# Altium PCB X-Bot.PcbDoc
Units mil, origin at the board's own origin, x right, y up, seen from the top; angles counter-clockwise.
Board outline 3475.03 x 2705.03 mil, 2 copper layers (Top1, Bottom4), stack 53.981 mil thick; 46 components, 50 nets, 205 pads, 123 vias.
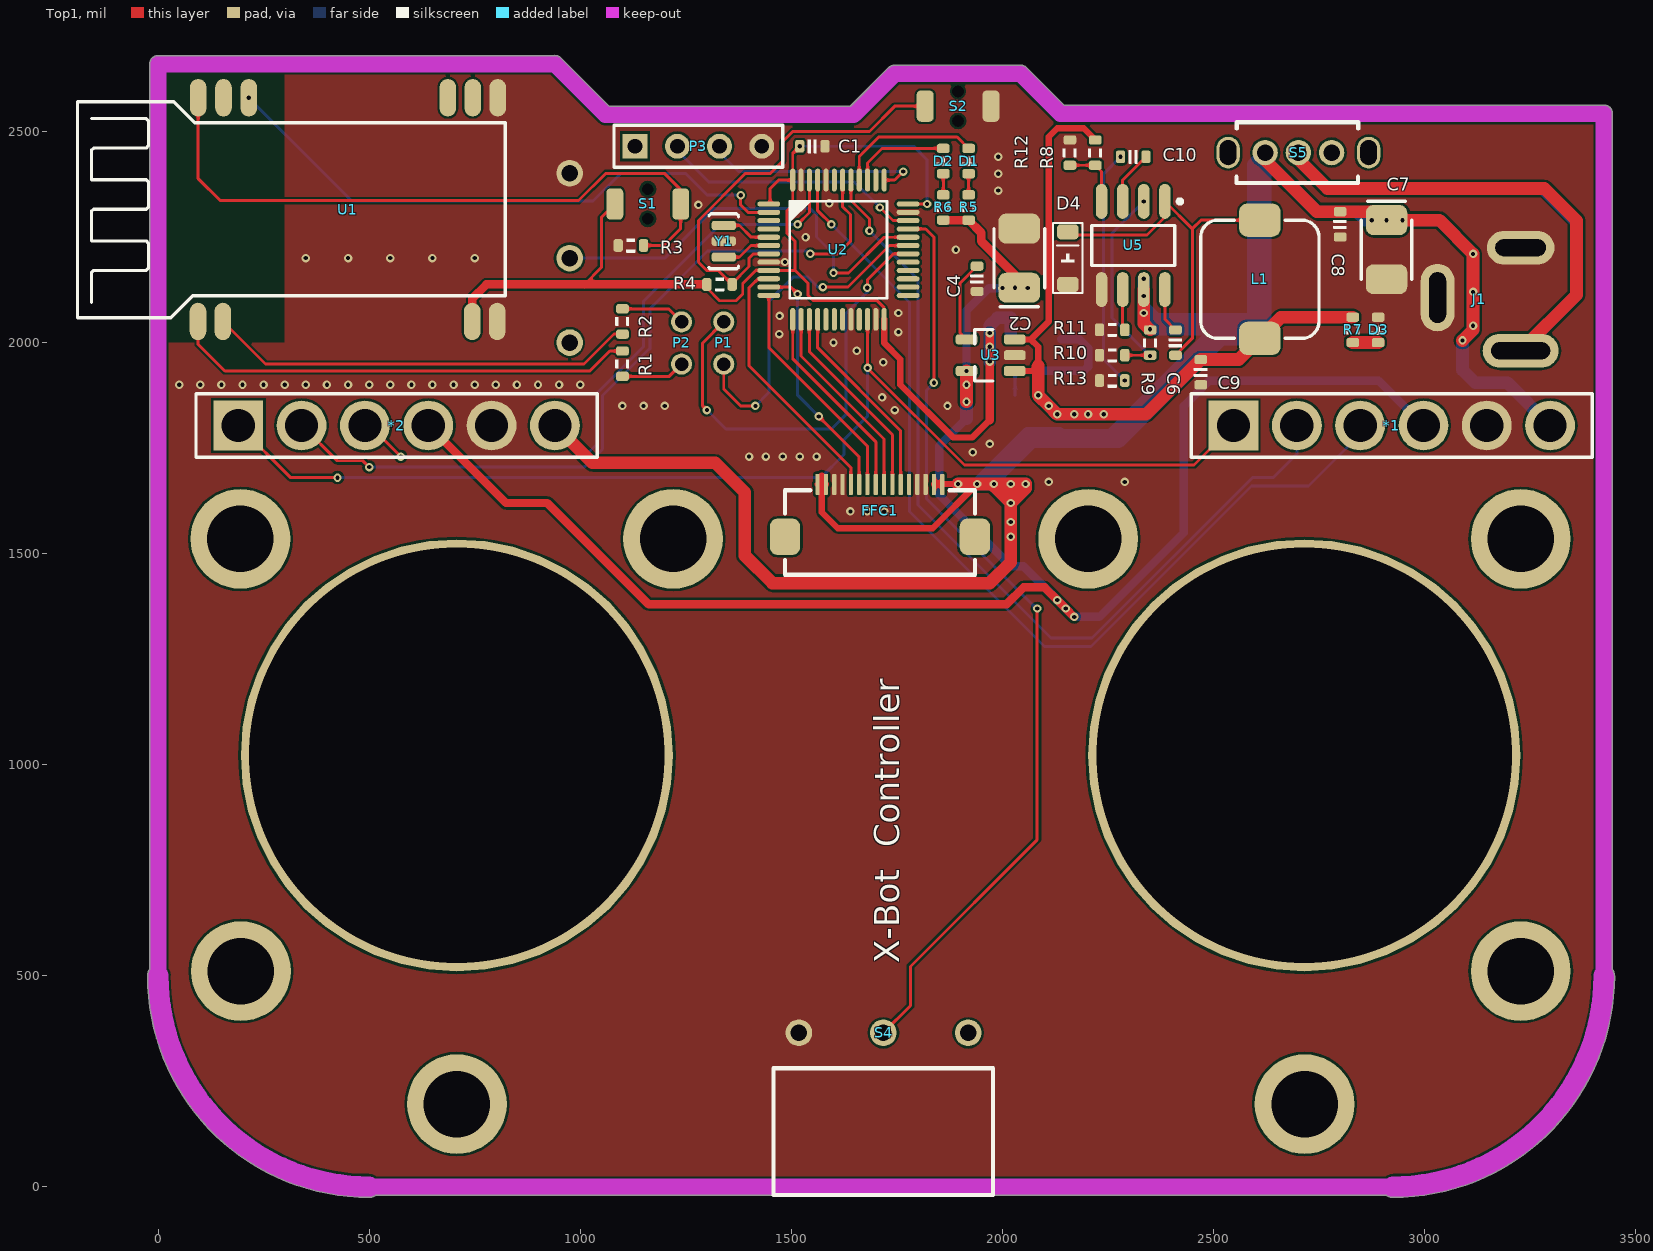
[diagram p0: Top1 view]
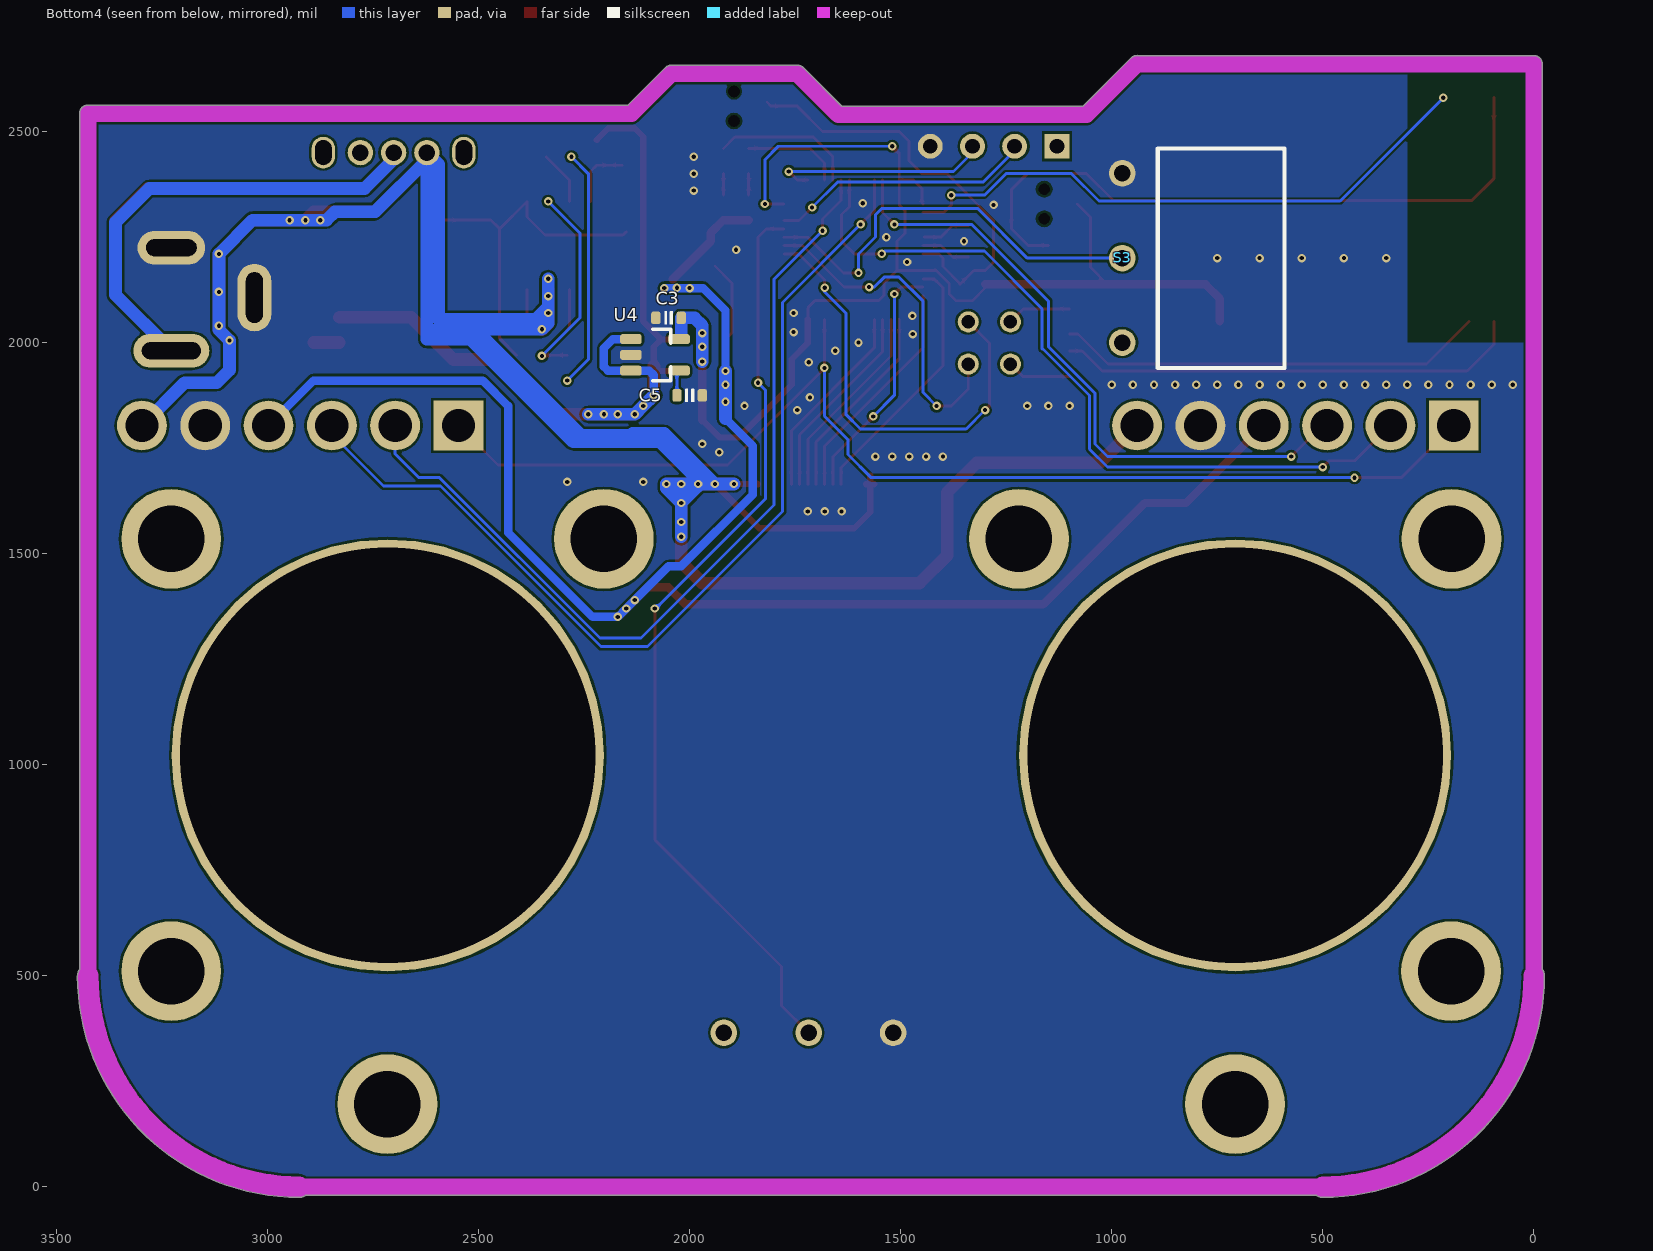
[diagram p1: Bottom4 view, seen from below]
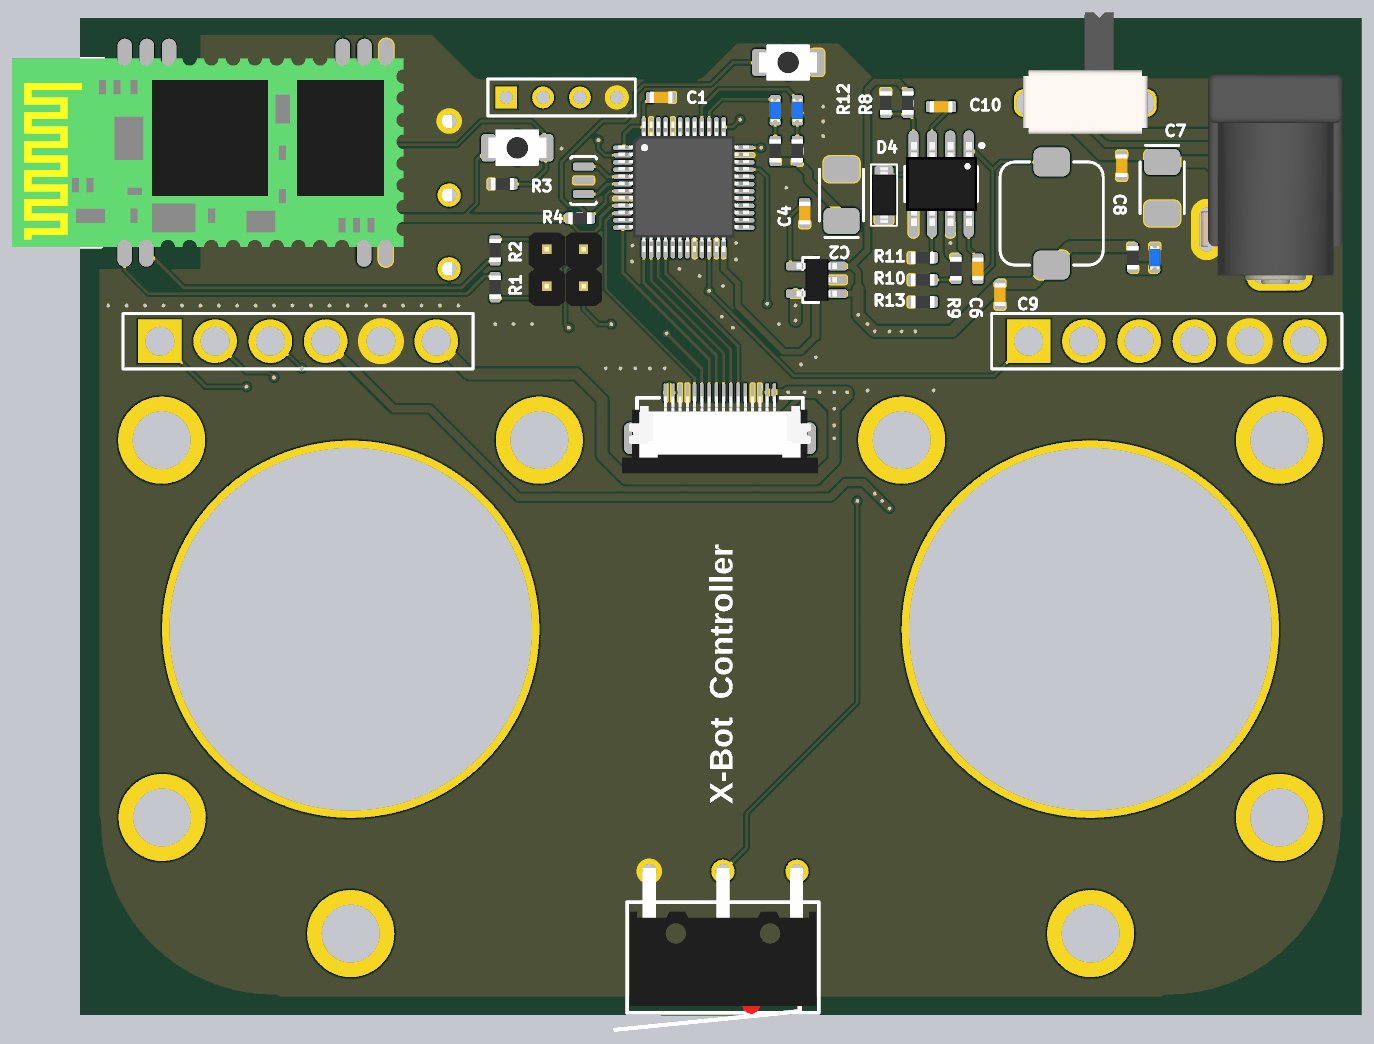
[diagram p2: 3D render of the assembled board from above, using the file's embedded part models]
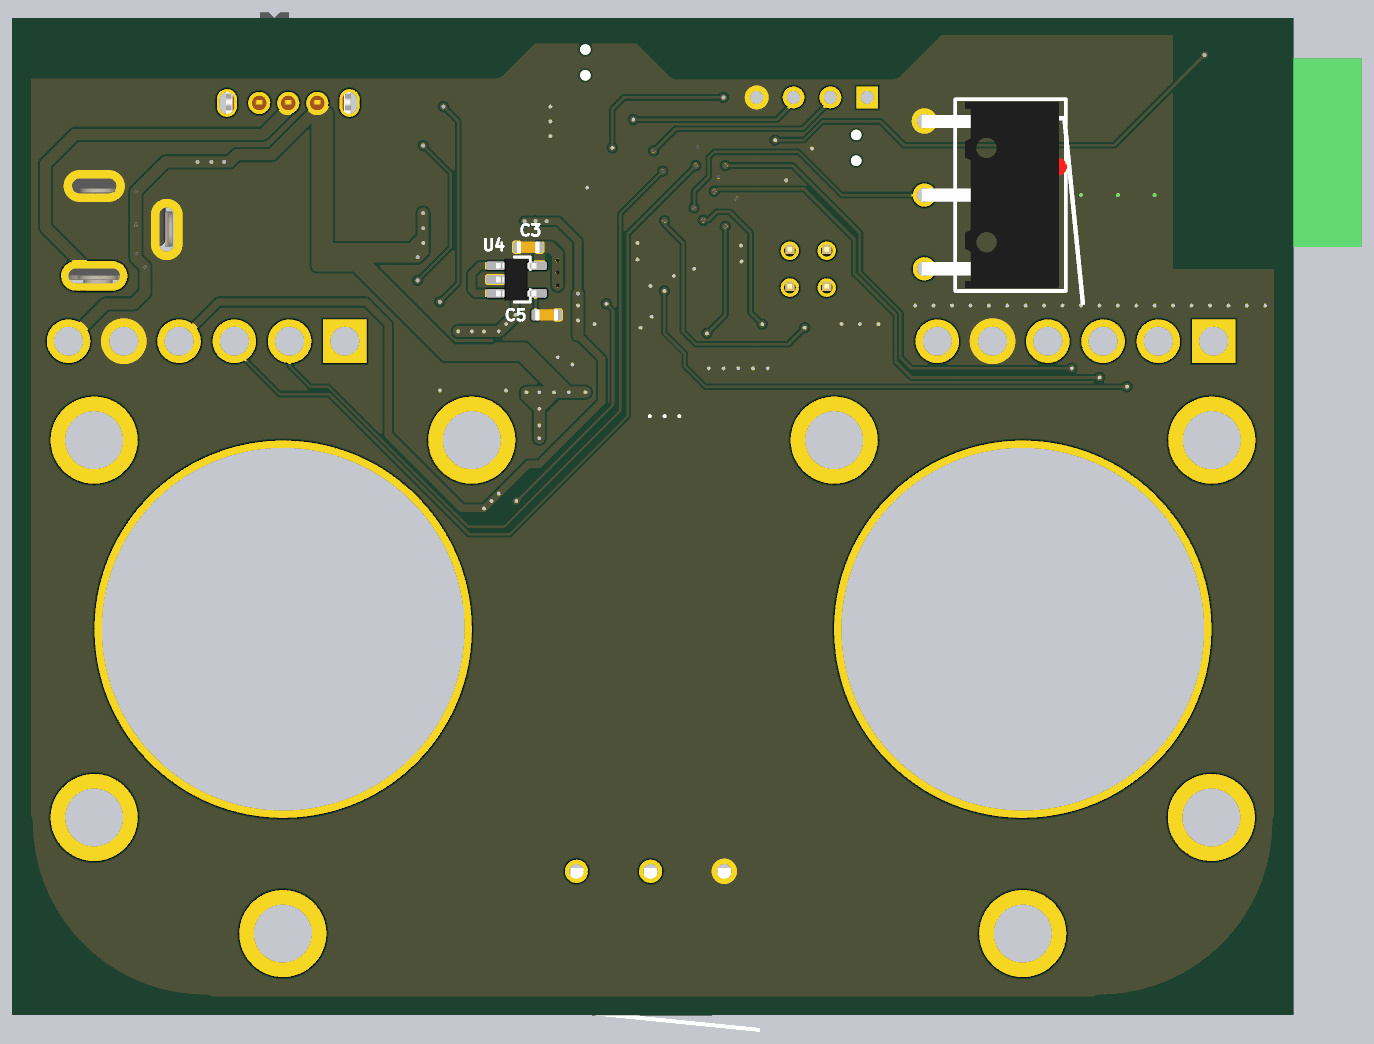
[diagram p3: 3D render of the assembled board from below, using the file's embedded part models]

## Layer stack, top to bottom
Top Solder: solder mask 0.4, Solder Resist, Dk 3.5
Top1: signal copper 1.4
Dielectric 1: core 51.1811, FR-4, Dk 4.2
Bottom4: signal copper 1.4
Bottom Solder: solder mask 0.4, Solder Resist, Dk 3.5

## Board outline
-25.01,500 cw(c0,500) -19.7,515.42 -19.7,2660 cw(c0,2660) 0,2679.7 936.46,2679.7 cw(c940,2660) 954.15,2674.15 1068.29,2560.02 1639.71,2560.02 1730.97,2651.27 1730.93,2651.24 cw(c1745.12,2637.12) 1745.12,2657.13 2042.88,2657.13 cw(c2042.88,2637.12) 2057.07,2651.24 2057.03,2651.27 2145.79,2562.52 3425,2562.52 cw(c3425,2542.5) 3445.01,2542.5 cw(c3425,2542.5) 3444.7,2538.96 3444.7,515.42 cw(c3425,500) 3450.02,500 cw(c2925,500) 2925,-25.01 cw(c2925,0) 2909.58,-19.7 515.42,-19.7 cw(c500,0) 500,-25.01 cw(c500,500)

## Design rules (kind name [scope] priority, off if disabled: settings)
Clearance [All] p1: gap=5.5
ComponentClearance [All] p1: gap=0 collisioncheckmode=3 verticalgap=0 showdistances=FALSE
DiffPairsRouting [All] p1: maxlimit=9 minlimit=9 mostfreqgap=9 toplayer_minwidth=4 toplayer_maxwidth=4 toplayer_prefwidth=4 bottomlayer_minwidth=4 bottomlayer_maxwidth=4 bottomlayer_prefwidth=4 maxuncoupledlength=500
FanoutControl Fanout_BGA [All] p1: bgadir=Out bgaviamode=Centered fanoutstyle=Auto fanoutdirection=Alternating viagrid=1 // Fanout_BGA (Default Rule)
HoleSize [All] p1: absolutevalues=TRUE maxlimit=10000 minlimit=8 maxpercent=80.000 minpercent=20.000
MinimumSolderMaskSliver [All] p1 off: minsoldermaskwidth=2
PlaneClearance [All] p1: clearance=8
PlaneConnect [All] p1: planeconnectstyle=Direct reliefexpansion=20 reliefentries=4 reliefconductorwidth=10 reliefairgap=10
PolygonConnect [All] p1: connectstyle=Direct reliefconductorwidth=10 reliefentries=4 polygonreliefangle="90 Angle" airgapwidth=10
RoutingVias [All] p1: holewidth=8 width=16 viastyle="Through Hole" minholewidth=6 minwidth=12 maxholewidth=28 maxwidth=50
SilkToBoardRegionClearance [All] p1 off:
SilkToSilkClearance [All] p1: silktosilkclearance=0
SilkToSolderMaskClearance [IsPad] p1: minsilkscreentomaskgap=0 clearancetoexposedcopper=TRUE
SolderMaskExpansion [All] p1: expansion=3
Width [All] p1: maxlimit=10000 minlimit=6 preferedwidth=7
20 further rules are at their usual default settings.

## Components (designator, comment, footprint, x,y, rotation, side; value= is the part's Value field where it differs from the comment)
*1 "STEPPER_DRIVER" STEPPER_DRIVER 2947.5,1803.5 r0 top
*2 "STEPPER_DRIVER" STEPPER_DRIVER 590,1803.5 r0 top
C1 "0.1u" 0603-CAP 1550,2465 r180 top
C2 "100uF" 3528-CAP 2040,2200 r90 top
C3 "10uF" 0603-CAP 2050,2058.5 r180 bottom
C4 "10nF" 0603-CAP 1940,2151.1 r90 top
C5 "10nF" 0603-CAP 2000,1874.82 r0 bottom
C6 "0.1u" 0603-CAP 2410,2000 r270 top
C7 "100uF" 3528-CAP 2910,2220 r270 top
C8 "0.1u" 0603-CAP 2800,2280 r90 top
C9 "0.1u" 0603-CAP 2470,1930 r270 top
C10 "0.1u" 0603-CAP 2310,2440 r0 top
D1 "LED-0603" 0603-LED-BLUE 1920,2430 r90 top
D2 "LED-0603" 0603-LED-BLUE 1860,2430 r90 top
D3 "LED-0603" 0603-LED-BLUE 2890,2030 r90 top
D4 "二极管-5819W" SOD-123 2155,2200 r90 top
FFC1 "FFC_0.5_16" FFC_0.5_16 1710,1600 r0 top
J1 "PowerJack_2.5" KLD_0202 3227.72,2520 r270 top
L1 "10uH" L-SMD-7 2610,2150 r270 top
P1 "HDR1x2_2.54" HDR1X2_2.54_180 1340,2049.08 r0 top
P2 "HDR1x2_2.54" HDR1X2_2.54_180 1240,2049.08 r0 top
P3 "Header 4" HDR1X4 1130,2465 r0 top
R1 "33R" 0603-RES 1100,1950 r90 top
R2 "33R" 0603-RES 1100,2050 r270 top
R3 "4.7K" 0603-RES 1120,2230 r0 top
R4 "4.7K" 0603-RES 1330,2137.66 r180 top
R5 "1K" 0603-RES 1920,2320 r90 top
R6 "1K" 0603-RES 1860,2320 r90 top
R7 "500R" 0603-RES 2830,2030 r270 top
R8 "47K" 0603-RES 2220,2450 r270 top
R9 "100K" 0603-RES 2350,2000 r90 top
R10 "50K" 0603-RES 2260,1970 r0 top
R11 "100K" 0603-RES 2260,2030 r0 top
R12 "9K" 0603-RES 2160,2450 r270 top
R13 "100K" 0603-RES 2260,1910 r0 top
S1 "ButtonTACT_3x4x2_180" ButtonTACT_3x4x2_180H 1160,2328.27 r0 top
S2 "ButtonTACT_3x4x2_180" ButtonTACT_3x4x2_180H 1895,2560 r0 top
S3 "LimitSwitch" "LIMIT SWITCH" 761,2200 r90 bottom
S4 "LimitSwitch" "LIMIT SWITCH" 1718,151 r0 top
S5 "SwitchSPDT_4.3x8.6_D90" SwitchSPDT_4.3X8.6_D90 2780,2450 r180 top
U1 "HC-06" 蓝牙模块HC-06 870,2060 r90 top
U2 "STM32F103C8T6" LQFP-48 1611.73,2220 r0 top
U3 "LP2992" SOT23-5 1970,1970 r180 top
U4 "LP2992" SOT23-5 2080,1970.82 r180 bottom
U5 "MP1584" SO-8 2310,2230 r270 top
Y1 "8MHz" 晶振-3P 1340,2240 r90 top

## Footprints (in the part's own frame and the unit in brackets; to place one, negate y for a bottom-side part, rotate by r counter-clockwise, add the part's x,y. Pads: shape width x height; smd on the part's side, far side on the other; paste and mask are expansions set on the pad)
0603-CAP [mil]
  rrect50% 22x30 smd: 1(-30,0) 2(30,0)
  silkscreen extent -10,-15 10,15, body extent -31,-16 32,16, height 31
0603-LED-BLUE [mil]
  rrect50% 22x30 smd: 1(-30,0) 2(30,0)
  silkscreen extent -10,-16 10,16, body extent -32,-16 32,16, height 24
0603-RES [mil]
  rrect50% 22x30 smd: 1(-30,0) 2(30,0)
  silkscreen extent -10,-16 10,16, body extent -31,-16 31,16, height 18
3528-CAP [mm] "钽电容"
  rrect50% 1.8x2.5 smd: 1(-1.778,0) 2(1.778,0)
  silkscreen extent -2.92,-1.52 1.78,1.52, body extent -1.91,-1.4 1.91,1.4, height 1.1
ButtonTACT_3x4x2_180H [mil]
  round 0 hole 28: 0(0,-35) 0(0,35)
  rrect50% 40x74 smd: 1(-78,0) 2(78,0)
  body extent -79,-49 79,49, height 63
FFC_0.5_16 [mil]
  rrect50% 72x86 smd: 0(-225,-60) 0(225,-60)
  rrect50% 10x50 smd: 1(-147.64,64) 2(-127.95,64) 3(-108.27,64) 4(-88.58,64) 5(-68.9,64) 6(-49.21,64) 7(-29.53,64) 8(-9.84,64) 9(9.84,64) 10(29.53,64) 11(49.21,64) 12(68.9,64) 13(88.58,64) 14(108.27,64) 15(127.95,64) 16(147.64,64)
  silkscreen extent -225,-150 225,50, body extent -266,-155 266,55, height 82
HDR1X2_2.54_180 [mil]
  round 50 hole 32: 1(0,0) 2(0,-100)
  body extent -49,-150 49,50, height 323
HDR1X4 [mm] "Connector; Header; 4 Position"
  rect 1.5x1.5 hole 0.9: 1(0,0)
  round 1.5 hole 0.9: 2(2.54,0) 3(5.08,0) 4(7.62,0)
  silkscreen extent -1.27,-1.27 8.89,1.27
KLD_0202 [mil]
  oval 80x180 hole 40 slot 140 at 90 deg: 1(539.37,0)
  oval 80x160 hole 40 slot 120 at 90 deg: 2(295.28,0)
  oval 160x80 hole 40 slot 120 at 0 deg: 3(413.39,-196.85)
  body extent -9,-213 562,173, height 433
L-SMD-7 [mm] "贴片电感7*7"
  rrect50% 2x2.5 smd: 1(-3.556,0) 2(3.556,0)
  silkscreen extent -3.56,-3.56 3.56,3.56, body extent -3.56,-3.56 3.56,3.56, height 4
"LIMIT SWITCH" [mm]
  round 1.6 hole 1: 1(-5.08,5.436) 2(0,5.436) 3(5.105,5.436)
  silkscreen extent -6.6,-4.32 6.6,3.3, body extent -7.58,-5.65 6.4,5.65, height 5.8
LQFP-48 [mil]
  oval 54x12 smd: 1(-165,108.27) 2(-165,88.58) 3(-165,68.9) 4(-165,49.21) 5(-165,29.53) 6(-165,9.84) 7(-165,-9.84) 8(-165,-29.53) 9(-165,-49.21) 10(-165,-68.9) 11(-165,-88.58) 12(-165,-108.27) 25(165,-108.27) 26(165,-88.58) 27(165,-68.9) 28(165,-49.21) 29(165,-29.53) 30(165,-9.84) 31(165,9.84) 32(165,29.53) 33(165,49.21) 34(165,68.9) 35(165,88.58) 36(165,108.27)
  oval 12x54 smd: 13(-108.27,-165) 14(-88.58,-165) 15(-68.9,-165) 16(-49.21,-165) 17(-29.53,-165) 18(-9.84,-165) 19(9.84,-165) 20(29.53,-165) 21(49.21,-165) 22(68.9,-165) 23(88.58,-165) 24(108.27,-165) 37(108.27,165) 38(88.58,165) 39(68.9,165) 40(49.21,165) 41(29.53,165) 42(9.84,165) 43(-9.84,165) 44(-29.53,165) 45(-49.21,165) 46(-68.9,165) 47(-88.58,165) 48(-108.27,165)
  silkscreen extent -115,-115 115,115, body extent -177,-175 177,180, height 61
SO-8 [mm]
  oval 2.1x0.7 smd: 1(-2.65,1.905) 2(-2.65,0.635) 3(-2.65,-0.635) 4(-2.65,-1.905) 5(2.65,-1.905) 6(2.65,-0.635) 7(2.65,0.635) 8(2.65,1.905)
  silkscreen extent -2.77,-2.5 1.2,2.93, body extent -2.89,-2.41 2.89,2.49, height 1.45
SOD-123 [mm]
  rrect50% 0.9x1.3 smd: 1(-1.583,0) 2(1.583,0)
  silkscreen extent -2.11,-0.89 2.11,0.89, body extent -1.92,-0.86 1.93,0.84, height 1.48
SOT23-5 [mm] "SOT23, 3-Leads, Body 3.1x3.0mm (max), Pitch 0.95mm, IPC Medium Density"
  rrect50% 1.3x0.6 smd: 1(-1.5,0.95) 2(-1.5,0) 3(-1.5,-0.95) 4(1.396,-0.95) 5(1.396,0.95)
  silkscreen extent -0.2,-1.55 0.9,1.55, body extent -1.48,-1.45 1.32,1.45, height 1.2
STEPPER_DRIVER [mm]
  rect 3x3 hole 2: 1(-10.16,0)
  round 3 hole 2: 2(-6.35,0) 3(-2.54,0) 4(1.27,0) 5(5.08,0) 6(8.89,0)
  silkscreen extent -12.7,-1.91 11.43,1.91
SwitchSPDT_4.3X8.6_D90 [mil]
  oval 55x75 hole 39.37 slot 59.06 at 90 deg: 0(-87.68,0) 0(245.16,0)
  round 60 hole 39.37: 1(0,0) 2(78.74,0) 3(157.48,0)
  silkscreen extent -63,-72 225,72, body extent -91,-246 248,84, height 190
晶振-3P [mm] "贴片晶振"
  rrect50% 0.55x1.45 smd: 1(-0.95,0) 2(0,0) 3(0.95,0)
  silkscreen extent -1.65,-0.89 1.65,0.91, body extent -1.75,-0.75 1.75,0.75, height 0.3
蓝牙模块HC-06 [mil]
  oval 88.74x39.37 smd: 1(-10,775.43) 2(-10,716.38) 12(-10,125.83) 13(-10,66.77) 22(520,65.43) 23(520,124.49) 24(520,183.54) 32(520,655.04) 33(520,715) 34(520,775)
  silkscreen extent -1,48 511,1061, body extent -1,19 511,1082, height 163

## Part data
C1 C3 C4 C5 C6 C8 C9 C10: library part 电容-0603, "Capacitor"
C2 C7: library part "电容 3528", "极性电解电容"
D1 D2 D3: "LED"
D4: "40V"
FFC1: "FFC"
J1: "DC Power Jack"
L1: library part 电感-0805, "磁珠"
P1 P2: "Header"
P3: "Header, 4-Pin"
R1 R2 R3 R4 R5 R6 R7 R8 R9 R10 R11 R12 R13: library part 电阻-0603, "Resistor"
S1 S2: "Button"
S5: "Switch"
U1: library part HM01_02_09_1, "HM bluetooth module HM-01,HM-02,HM-09"
U2: "MCU"
U3 U4: "LDO"
U5: "电源芯片"
Y1: library part 晶振-3Pin, "村田贴片"

## Free pads (board coordinates)
  round 236.22 hole 157.48: ""(195,1535) ""(196.23,511) ""(708,196) ""(1219.85,1535) ""(2203.15,1535) ""(2715.91,196) ""(3228,511) ""(3228,1535)
  round 1023.62 hole 984.25: ""(708,1022) ""(2715,1022)

## Via types
v1: diameter 20, hole 10, Top1 to Bottom4, tented both sides, 123 vias

## Nets (pads, with @x,y where several pads share a name; then routed paths per layer and width w, separated by ;. In a path a pad name is that pad's centre, name@x,y a point inside that pad or via, vN(x,y) a via of type N, cw(c..) or ccw(c..) an arc to the next point about the centre after c; other vN are vias at no path point)
ADC4: FFC1.9 U2.14 | length 472.5
  Top1 w7: U2.14 1523.15,1968.11 1719.84,1771.42 FFC1.9
ADC5: FFC1.10 U2.15 | length 472.5
  Top1 w7: U2.15 1542.83,1978.17 1739.53,1781.47 FFC1.10
ADC6: FFC1.11 U2.16 | length 472.5
  Top1 w7: U2.16 1562.52,1987.48 1759.21,1790.79 FFC1.11
BT_CNT: U1.32 U2.2 | length 1412
  Top1 w7: v1(1380,2349.21) 1380,2325.82 1397.24,2308.58 U2.2
  Bottom4 w7: v1@214.4,2580 459.06,2335.33 1030.44,2335.33 1095.1,2400 1250.76,2400 1301.55,2349.21 v1(1380,2349.21)
  other v1: 214.96,2580
BT_Rx: P2.1 R2.1 | length 152.8
  Top1 w7: R2.1 1209.08,2080 P2.1
BT_SET: R3.2 S1.2 U1.34 | length 1595.8
  Top1 w7: U1.34 95,2388.27 147.05,2336.22 996.22,2336.22 1061,2401 1199,2401 1238,2362 S1.2 1238,2270 1198,2230 R3.2
BT_Tx: P2.2 R1.1 | length 152
  Top1 w7: R1.1 1210.92,1920 P2.2
GND: *1.5 *2.5 C1.1 C2.2 C3.1 C4.1 C5.1 C7.2 C8.1 C9.2 D3.2 D4.1 FFC1.3 FFC1.4 FFC1.13 FFC1.14 J1.2 J1.3 P3.4 R3.1 R10.1 R11.1 R12.1 R13.1 S2.2 S3.3 S4.1 U1.13 U1.22 U2.8 U2.20 U2.23 U2.35 U2.44 U2.47 U3.2 U4.2 U5.5 Y1.2
  other v1: 1640,1600 1680,1600 1720,1600 2110,1670 2290,1670 1400,1730 1440,1730 1480,1730 1520,1730 1560,1730 1930,1740 1970,1760 1745,1840 1100,1850 1150,1850 1200,1850 1870,1850 1715,1870 50,1900 100,1900 150,1900 200,1900 250,1900 300,1900 350,1900 400,1900 450,1900 500,1900 550,1900 600,1900 650,1900 700,1900 750,1900 800,1900 850,1900 900,1900 950,1900 1000,1900 1718,1953.28 1654.82,1980.63 1600,2000 1471.52,2020 1753.83,2024.94 1472.22,2063.25 1753.83,2070 1485,2190.89 350,2200 450,2200 550,2200 650,2200 750,2200 1890,2220 1350,2240 1533.83,2249.53 1280,2326.05 1590,2330 1990,2360 1990,2400 1990,2440
LED1: D1.2 U2.40 | length 345.3
  Top1 w7: U2.40 1660.94,2440.94 1707,2487 1893,2487 D1.2
LED2: D2.2 U2.39 | length 234.2
  Top1 w7: U2.39 1680.63,2425.63 1715,2460 D2.2
NetC4_2: C4.2 U3.4 | length 196.5
  Top1 w7: U3.4 1900,2022.46 1900,2141.1 C4.2
NetC5_2: C5.2 U4.4 | length 60.6
  Bottom4 w7: U4.4 2030,1928.48 C5.2
NetC6_1: C6.1 U5.8 | length 106
  Top1 w7: U5.8 2385,2055 C6.1
NetC6_2: C6.2 D4.2 L1.1 U5.1 | length 869
  Top1 w7: D4.2@2150,2262.34 2157.34,2255 2342.76,2255 2385,2297.24 U5.1 2450,2269.33 ; C6.2 2450,2010 2450,2269.33 ; L1.1 2470.67,2290 2450,2269.33
NetC10_1: C10.1 R13.2 | length 567.3
  Bottom4 w7: v1(2280,2440) 2240,2400 2240,1960 v1(2290,1910)
NetC10_2: C10.2 U5.3 | length 128.5
  Top1 w7: U5.3 2285,2385 C10.2
NetD1_1: D1.1 R5.2 | length 50
  Top1 w7: R5.2 D1.1
NetD2_1: D2.1 R6.2 | length 50
  Top1 w7: R6.2 D2.1
NetD3_1: D3.1 R7.2 | length 60
  Top1 w30: R7.2 D3.1
NetJ1_1: J1.1 S5.2 | length 2193.8
  Top1 w30: S5.2 2701.26,2433.74 2770,2365 3283.9,2365 3360,2288.9 3360,2112.91 J1.1
  Bottom4 w30: S5.2 2701.26,2433.74 2770,2365 3280,2365 3360,2285 3360,2112.91 J1.1
NetR1_2: R1.2 U1.1 | length 1105.3
  Top1 w7: U1.1 94.57,1996.06 158.03,1932.6 1022.6,1932.6 1070,1980 R1.2
NetR2_2: R2.2 U1.2 | length 1017.6
  Top1 w7: U1.2 254.54,1949.08 1009.08,1949.08 1080,2020 R2.2
NetR8_2: R8.2 R12.2 U5.4 | length 151.9
  Top1 w7: R12.2 R8.2 2235,2405 U5.4
NetR9_1: R9.1 R10.2 U5.2 | length 494.2
  Top1 w7: R10.2 R9.1
  Bottom4 w7: v1(2335,2334.33) 2260,2259.33 2260,2058.5 v1(2350,1968.5)
NetR11_2: R11.2 U5.6 | length 97.7
  Top1 w7: U5.6 2285,2035 R11.2
NetU2_5: U2.5 Y1.3 | length 116.5
  Top1 w7: Y1.3 1377.28,2277.4 1405,2249.69 U2.5@1445,2249.69
NetU2_6: U2.6 Y1.1 | length 118
  Top1 w7: Y1.1 1377.6,2202.6 1404.84,2229.84 U2.6
P_PWM: FFC1.8 U2.13 | length 472.5
  Top1 w7: U2.13 1503.46,1961.54 1700.16,1764.84 FFC1.8
S_DIR: FFC1.7 U2.12 | length 544.6
  Top1 w7: U2.12 1446.73,1988.27 1680.47,1754.53 FFC1.7
S_EN: FFC1.6 U2.11 | length 586.5
  Top1 w7: U2.11 1498.58,2131.42 v1(1515,2115) ; v1(1565,1825) 1660.79,1729.21 FFC1.6
  Bottom4 w7: v1(1515,2115) 1515,1875 v1(1565,1825)
S_PWM: FFC1.5 U2.10 | length 621.3
  Top1 w7: U2.10 1421.1,2151.1 1400,2130 1400,1945 1641.1,1703.9 FFC1.5
ST_NRST: R4.1 S2.1 U2.7 | length 1011.2
  Top1 w7: U2.7 1410.16,2210.16 1400,2200 1400,2180 1360,2140 R4.1 1326.87,2170.79 1299.69,2170.79 1280,2190.47 1280,2289.43 1391.57,2401 1451,2401 1480,2430 1480,2476.54 1503.46,2500 1685,2500 1745,2560 1807,2560 S2.1@1817,2570
ST_Rx: P1.2 U2.31 | length 815.8
  Top1 w7: P1.2 1340,1890 1380,1850 v1(1415,1850) ; v1(1575,2131.42) 1634.42,2131.42 1732.84,2229.84 U2.31
  Bottom4 w7: v1(1415,1850) 1446.73,1881.73 1446.73,2097.8 1503.94,2155 1538.94,2155 1562.52,2131.42 v1(1575,2131.42)
ST_Tx: P1.1 U2.30 | length 1058.4
  Top1 w7: v1(1300,1840) 1290,1850 1290,1999.08 P1.1 ; v1(1680,2130) 1680,2148.27 1741.89,2210.16 U2.30
  Bottom4 w7: v1(1300,1840) 1345,1795 1595,1795 1630,1830 1630,2070 1680,2120 v1(1680,2130)
STEPPER_EN: *1.1 *2.1 U2.22 | length 2847.6
  Top1 w7: *2.1@194.2,1800 314.2,1680 v1(425,1680) ; U2.22 v1(1680.63,1940) 1680.63,1939.37 1910,1710 2454,1710 *1.1
  Bottom4 w7: v1(425,1680) 1570,1680 1625,1735 1625,1770 1680.63,1825.63 v1(1680.63,1940)
SWCLK: P3.3 U2.37 | length 521.9
  Top1 w7: U2.37 1745,2385 v1(1765,2405)
  Bottom4 w7: P3.3 1330,2450 1375,2405 v1(1765,2405)
SWDIO: P3.2 U2.34 | length 625.5
  Top1 w7: v1(1710,2320) 1741.1,2288.9 U2.34
  Bottom4 w7: P3.2 1230,2455 1305,2380 1650,2380 v1(1710,2320)
VDD-3.3V: *1.4 *2.4 C2.1 R5.1 R6.1 U3.5 | length 4417
  Top1 w20: *2.4@644.2,1800 824.2,1620 922,1620 1162,1380 2010,1380 2050,1420 2100,1420 v1(2130,1390) v1(2150,1370) v1(2170,1350) ; R6.1 R5.1 1950,2260 1950,2240 C2.1@2040,2150
  Top1 w30: v1(1915.06,1860) v1(1915.06,1900) v1(1915.06,1932.6)
  Bottom4 w20: 1915.06,1820.06 1850,1755 1850,1640 2020,1470 2050,1470 v1(2130,1390) v1(2150,1370) v1(2170,1350) 2230,1350 2430,1550 2430,1850 2490,1910 2891,1910 *1.4 ; v1(1915.06,1932.6) 1915.06,2076.06 1968.08,2129.08 v1(2000,2129.08) v1(2060,2129.08)
  Bottom4 w30: 1915.06,1820.06 v1(1915.06,1860) v1(1915.06,1900) v1(1915.06,1932.6)
  other v1: 2030,2130
VDD-3.3V-SYS: C1.2 C3.2 R4.2 S1.1 U1.12 U2.1 U2.9 U2.24 U2.36 U2.48 U4.5 | length 3134.9
  Top1 w7: 1010,2137.66 1050,2177.66 1050,2296.27 S1.1 ; R4.2 1300,2129.08 1330,2099.08 1369.08,2099.08 1385,2115 1385,2140 1415.79,2170.79 U2.9 1509.21,2170.79 ; U2.1 1450,2331.54 1450,2365 1470,2385 U2.48 ; v1(1520,2465) 1503.46,2448.46 U2.48 ; U2.24 1720,2082.2 1702.2,2100 1551.61,2100 1540,2111.61 1540,2140 1509.21,2170.79 ; U2.36 v1(1821.73,2328.27) ; U2.48 1503.46,2325.94 1490,2312.48 1490,2258.7 1509.21,2239.49 1509.21,2170.79
  Top1 w15: U2.24 1720,1999.08 1758.34,1960.74 1758.34,1900 1883.34,1775 1928.53,1775 1970,1816.47
  Top1 w20: U1.12 744.17,2104.17 777.66,2137.66 1010,2137.66 R4.2 ; 1970,1816.47 v1(1970,1955) v1(1970,1990) v1(1970,2022.46)
  Bottom4 w7: v1(1520,2465) 1790,2465 1821.73,2433.27 v1(1821.73,2328.27)
  Bottom4 w30: v1(1970,1955) v1(1970,1990) v1(1970,2022.46) 1970,2040 1988.5,2058.5 C3.2 U4.5@2020,2013.28
VDD-5V: C9.1 L1.2 R7.1 R8.1 U3.1 U3.3 U4.1 U4.3 | length 2189.7
  Top1 w15: U3.1 2072.6,1932.6 2085,1945 2085,1990 2067.6,2007.4 ; U3.3 2067.6,2007.4 ; R8.1 2192.69,2507.32 2130,2507.32 2110,2487.32 2110,2049.8 2067.6,2007.4
  Top1 w30: 2085,1945 v1(2085,1875) v1(2110,1850) v1(2130,1830) v1(2170,1830) v1(2203.15,1830) v1(2240,1830) 2340,1830 C9.1 2560,1960 L1.2 2660,2060 R7.1
  Bottom4 w20: v1(2085,1875) 2085,1922.5 2095.92,1933.42 U4.3 2193.42,1933.42 2203.15,1943.15 2203.15,1986.85 2181.77,2008.23 U4.1
  Bottom4 w30: v1(2085,1875) v1(2110,1850) v1(2130,1830) v1(2170,1830) v1(2203.15,1830) v1(2240,1830)
VIN: *1.6 *2.6 C7.1 C8.2 FFC1.1 FFC1.2 FFC1.15 FFC1.16 R9.2 S5.3 U5.7 | length 7917.1
  Top1 w15: FFC1.1 1572.2,1664 ; 1572.2,1685 1572.2,1664 ; FFC1.2 1572.2,1664 ; FFC1.15 1838.95,1665 v1(1895,1665) ; v1(1940,1665) 1835,1560 1610,1560 1572.2,1597.8 1572.2,1664
  Top1 w30: *2.6@944.2,1800 1029.2,1715 1320,1715 1390,1645 1390,1495 1455,1430 1970,1430 2020,1480 v1(2020,1540) v1(2020,1575) v1(2020,1620) ; v1(1895,1665) v1(1940,1665) v1(1980,1665) ; U5.7 v1(2335,2110) v1(2335,2070) 2335,2045 R9.2 ; S5.3 2622.52,2432.48 2745,2310 C8.2 2890,2310 v1(2910,2290) v1(2947.5,2290) 3035,2290 v1(3115,2210) v1(3115,2120) v1(3115,2040) 3115,2030 v1(3090,2005) ; v1(1980,1665) 1980,1660 v1(2020,1620) ; v1(1980,1665) v1(2020,1665) ; v1(2020,1620) 2055,1655 v1(2055,1665) v1(2020,1665) ; v1(2020,1620) v1(2020,1665)
  Bottom4 w30: v1(1895,1665) v1(1940,1665) ; v1(2020,1540) v1(2020,1575) v1(2020,1620) ; v1@2050,1665 v1(2020,1665) ; v1(2055,1665) 2055,1655 v1(2020,1620) ; v1(2335,2151.26) v1(2335,2110) 2335,2084.65 ; *1.6 3196,1905 3120,1905 3090,1935 v1(3090,2005) 3115,2030 v1(3115,2040) v1(3115,2120) v1(3115,2210) 3035,2290 v1(2947.5,2290) v1(2910,2290) v1(2875,2290) 2860,2290 2840,2310 2745,2310 S5.3@2622.52,2432.48 ; v1(1940,1665) v1(1980,1665) ; v1(1940,1665) 2060,1785 2135,1785 2140,1780 ; v1(1980,1665) 1980,1675 2070,1765 2155,1765 ; v1(1980,1665) 1980,1660 v1(2020,1620) ; v1(1980,1665) v1(2020,1665) ; v1(2020,1620) v1(2020,1665) ; 2140,1780 2256.58,1780 2484.1,2007.52 2518.44,2007.52 ; 2140,1780 2155,1765 ; 2155,1765 2275.92,1765 2518.44,2007.52 ; 2335,2084.65 2364.65,2055 2585,2055 2590,2050 2595,2055 2595,2422.48 S5.3 S5.3@2622.52,2432.48 ; 2335,2084.65 v1(2335,2070) 2335,2046.5 v1(2350,2031.5) 2598.54,2031.5 2622.52,2007.52 ; 2518.44,2007.52 2622.52,2007.52 ; 2622.52,2007.52 S5.3@2622.52,2432.48
X_DIR: *1.3 U2.45 | length 2294.7
  Top1 w7: U2.45 1562.52,2312.48 v1(1595,2280)
  Bottom4 w7: v1(1595,2280) 1780,2095 1780,1600 2100,1280 2210,1280 2590,1660 2725,1660 2845,1780 *1.3@2845,1795
X_LIMIT: S3.2 U2.32 | length 1005.6
  Top1 w7: v1(1600,2165) 1635.63,2165 1720.16,2249.53 U2.32
  Bottom4 w7: S3.2 1200,2200 1317.09,2317.09 1545.74,2317.09 1560,2302.83 1560,2250 1600,2210 v1(1600,2165)
X_STEP: *1.2 U2.41 | length 2111.6
  Top1 w7: U2.41 1641.26,2336.22 1685,2292.48 v1(1685,2265)
  Bottom4 w7: v1(1685,2265) 1800,2150 1800,1615 2115,1300 2212.32,1300 2592.32,1680 2641.16,1680 2697.5,1736.34 *1.2
Y_DIR: *2.3 U2.46 | length 1527.7
  Top1 w7: *2.3@494.2,1800 505,1800 v1(575,1730) ; v1(1515,2280) 1542.83,2307.83 U2.46
  Bottom4 w7: v1(575,1730) 1010,1730 1040,1760 1040,1880 1150,1990 1150,2098 1332,2280 v1(1515,2280)
Y_LIMIT: S4.2 U2.33 | length 2222.5
  Top1 w7: S4.2 1782.27,429.27 1782.27,522.27 2082.5,822.5 v1(2082.5,1370) ; U2.33 1818.27,2269.21 1837.95,2249.53 v1(1837.95,1905)
  Bottom4 w7: v1(1837.95,1905) 1820,1887.05 1820,1630 2080,1370 v1(2082.5,1370)
Y_STEP: *2.2 U2.42 | length 1845
  Top1 w7: *2.2@344.2,1800 424.2,1720 485,1720 v1(500,1705) ; v1(1545,2210.16) 1610.16,2210.16 1640,2240 1640,2303.27 1621.57,2321.69 U2.42
  Bottom4 w7: v1(500,1705) 1010,1705 1052.5,1747.5 1052.5,1874.82 1162.68,1985 1165,1985 1165,2080 1301.65,2216.65 1538.51,2216.65 v1(1545,2210.16)
Z_DIR: U2.21
Z_LIMIT: U2.38
Z_STEP: U2.43
pads on no net: FFC1.0 FFC1.12 P3.1 S1.0 S2.0 S3.1 S4.3 S5.0 S5.1 U1.23 U1.24 U1.33 U2.3 U2.4 U2.17 U2.18 U2.19 U2.25 U2.26 U2.27 U2.28 U2.29

## Polygon pours and split planes (outlines as drawn)
GND on Top1 "Top1-No Net" (solid, remove dead copper, pour order 4): 3600,2700 300,2700 300,2000 -100,2000 -100,-100 3600,-100
GND on Bottom4 "Top1-No Net" (solid, remove dead copper, pour order 6): 300,2700 300,2000 -100,2000 -100,-100 3600,-100 3600,2700

## Keep-outs
Keep-Out Layer:
  lines w39.37: 0,500 0,2660 940,2660 ; 500,0 2925,0 ; 3425,500 3425,2542.5
  lines w40: 940,2660 1060,2540 1648,2540 1745.12,2637.12 2042.88,2637.12 2137.5,2542.5 3425,2542.5
  lines w50: 0,500 ccw(c500,500) 500,0 ; 2925,0 ccw(c2925,500) 3425,500

## Silkscreen, mask and mechanical layers (free items; w line width, h text height)
Top Overlay:
  text "X-Bot  Controller" at 1775.78,530 h100 r90